# Altium PCB Controlador de velocidad.PcbDoc (part 2 of 2)
Units mil, origin at the board's own origin, x right, y up, seen from the top; angles counter-clockwise.
Board outline 3345 x 2660 mil, 2 copper layers (Top Layer, Bottom Layer); 54 components, 93 nets, 258 pads, 44 vias.
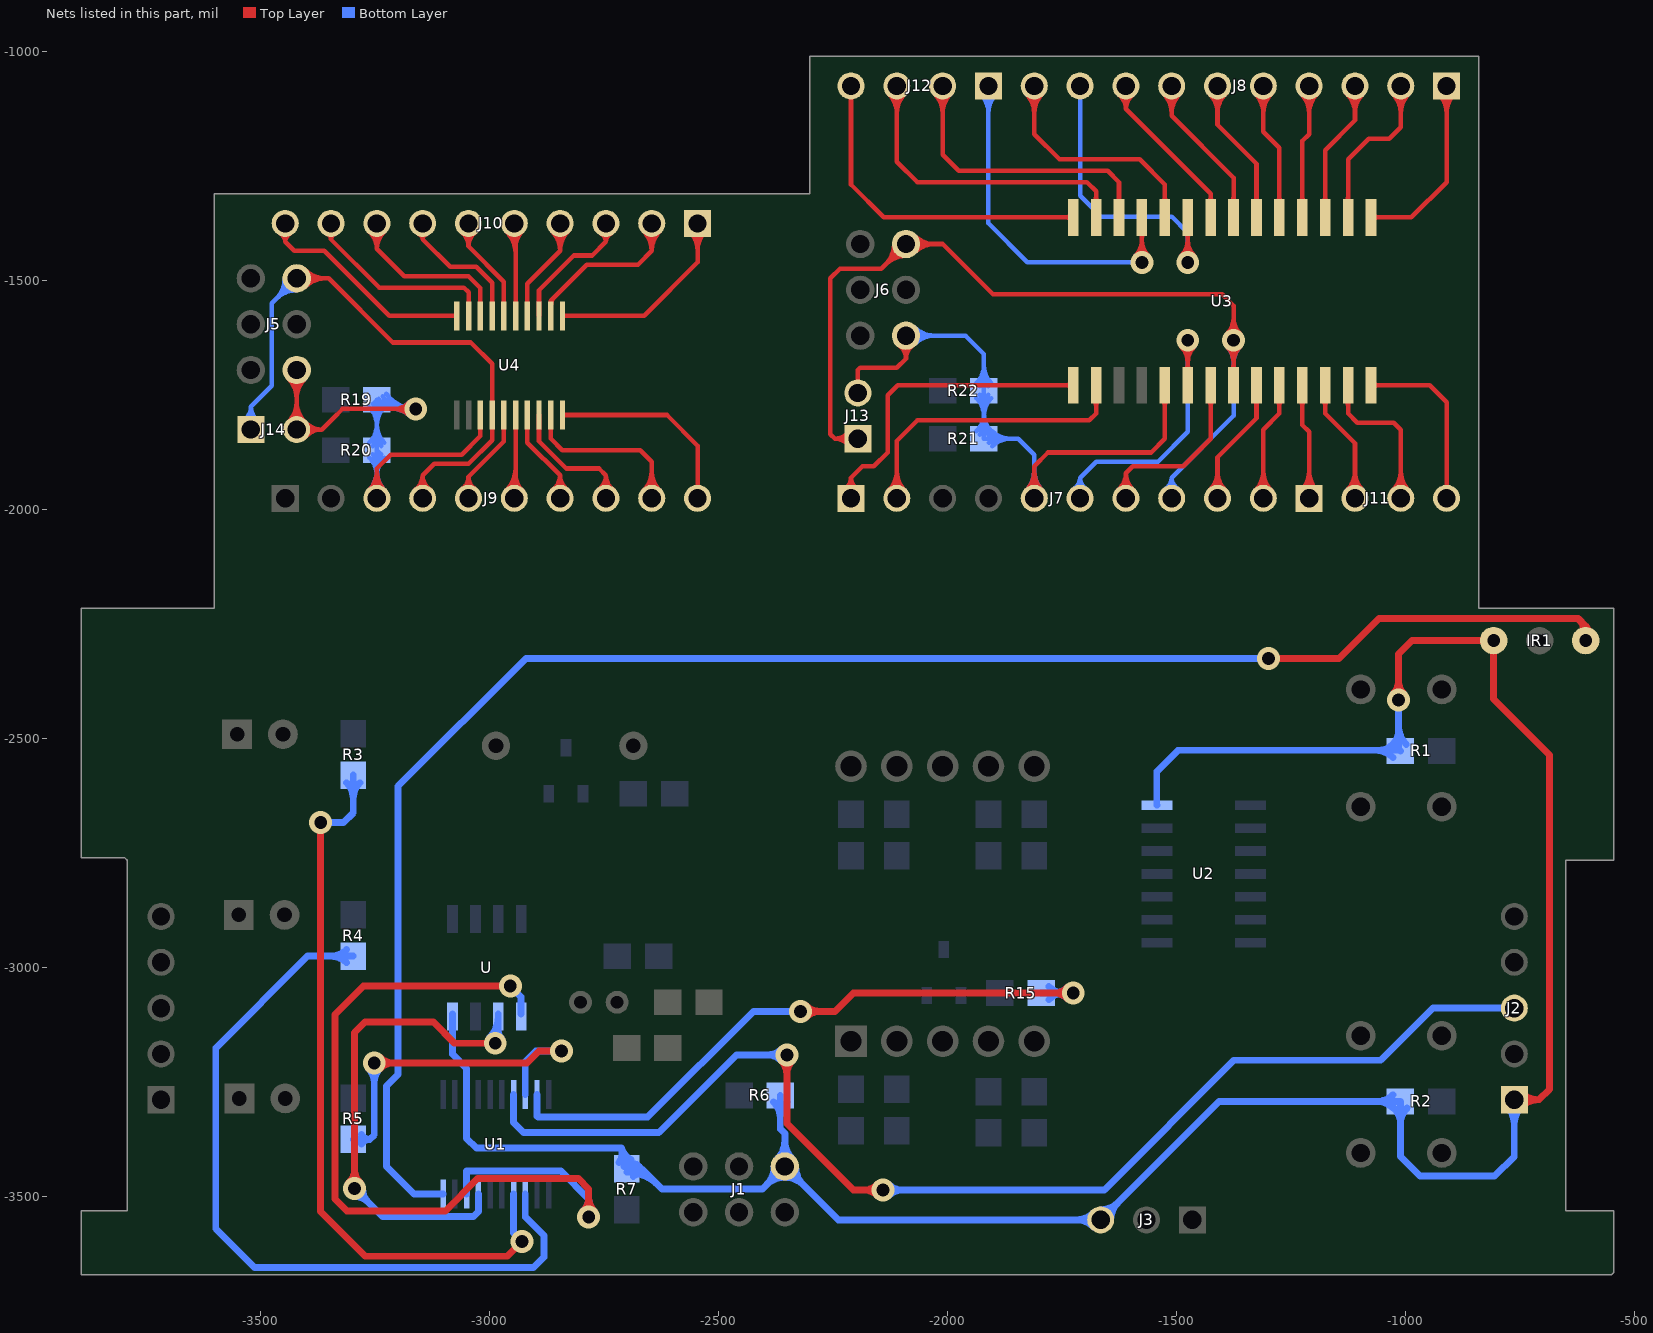
[diagram p2: the nets of this part, all layers, seen from the top]

## Via types
v1: diameter 50, hole 28, Top Layer to Bottom Layer, 44 vias

## Nets (pads, with @x,y where several pads share a name; then routed paths per layer and width w, separated by ;. In a path a pad name is that pad's centre, name@x,y a point inside that pad or via, vN(x,y) a via of type N, cw(c..) or ccw(c..) an arc to the next point about the centre after c; other vN are vias at no path point) (continued)
OPTO: J2.3 U1.7 | length 2964.6
  Top Layer w15: v1@-2362.37,-3202.37 cw(c-2392.25,-3232.25) -2350,-3232.25 cw(c-2307.75,-3232.25) v1@-2337.63,-3202.37 ; v1(-2350,-3190) -2350,-3340 -2205,-3485 v1(-2140,-3485) ; v1@-2152.37,-3497.37 ccw(c-2182.25,-3527.25) -2182.25,-3485 ccw(c-2182.25,-3442.75) v1@-2152.37,-3472.63
  Bottom Layer w15: U1.7@-2946.61,-3276.73 -2946.61,-3337.54 -2924.63,-3359.52 -2629.63,-3359.52 -2460.11,-3190 v1(-2350,-3190) ; v1@-2362.37,-3202.37 ccw(c-2392.25,-3232.25) -2392.25,-3190 ccw(c-2392.25,-3147.75) v1@-2362.37,-3177.63 ; v1(-2140,-3485) -1657.11,-3485 -1373.63,-3201.52 -1053.63,-3201.52 -939.93,-3087.82 J2.3@-762.17,-3087.82 ; v1@-2127.63,-3497.37 cw(c-2097.75,-3527.25) -2097.75,-3485 cw(c-2097.75,-3442.75) v1@-2127.63,-3472.63
RX: IR1.1 U1.20 | length 3857.9
  Top Layer w15: v1(-1298.63,-2324.52) -1144.52,-2324.52 -1057.52,-2237.52 -622.48,-2237.52 ; IR1.1@-613.39,-2282.68 ccw(c-651.93,-2266.94) -622.5,-2237.5 ; -606.54,-2253.46 cw(c-629.27,-2276.19) IR1.1@-599.51,-2288.35 ; IR1.1@-606.45,-2285.51 -606.45,-2253.55 -622.48,-2237.52
  Bottom Layer w15: U1.20@-3100.16,-3493.27 -3100.16,-3493.52 -3163.63,-3493.52 -3223.63,-3433.52 -3223.63,-3257.52 -3198.63,-3232.52 -3198.63,-2603.52 -2919.63,-2324.52 v1(-1298.63,-2324.52)
SCL: U1.17 U.6 | length 1279.3
  Top Layer w15: v1@-3306.01,-3469.15 ccw(c-3335.88,-3439.27) -3293.63,-3439.27 ccw(c-3251.39,-3439.27) v1@-3281.26,-3469.15 ; v1(-3293.63,-3481.52) -3293.63,-3141.52 -3270.63,-3118.52 -3121.48,-3118.52 -3075.48,-3164.52 v1(-2986.63,-3164.52)
  Bottom Layer w15: v1@-3293.63,-3499.02 cw(c-3293.63,-3541.27) -3263.76,-3511.4 cw(c-3233.89,-3481.52) v1@-3276.13,-3481.52 ; v1(-3293.63,-3481.52) -3232.63,-3542.52 -3034.39,-3542.52 -3023.39,-3531.52 U1.17@-3023.39,-3493.27 ; v1@-2999.01,-3152.15 ccw(c-3044.9,-3106.26) U.6@-2980,-3106.26 ; v1(-2986.63,-3164.52) -2980,-3157.89 U.6@-2980,-3101 ; -2980,-3138.29 ccw(c-2960.4,-3138.29) v1@-2974.26,-3152.15
SDA: U1.18 U.5 | length 2053.9
  Top Layer w15: v1(-2953.63,-3039.52) -3274.63,-3039.52 -3336.63,-3101.52 -3336.63,-3504.52 -3310.63,-3530.52 -3095.52,-3530.52 -3025,-3460 -2805,-3460 -2782.63,-3482.37 v1(-2782.63,-3543.52) ; v1@-2795.01,-3531.15 ccw(c-2824.88,-3501.27) -2782.63,-3501.27 ccw(c-2740.39,-3501.27) v1@-2770.26,-3531.15
  Bottom Layer w15: U1.18@-3048.98,-3493.27 -3048.98,-3443.52 -2843.19,-3443.52 -2782.63,-3504.08 ; v1(-2953.63,-3039.52) -2930,-3063.16 U.5@-2930,-3101 ; v1@-2794.38,-3530.55 ccw(c-2818.33,-3504.08) -2782.63,-3504.08 ; v1(-2782.63,-3543.52) -2782.63,-3504.08 ; v1@-2770.89,-3530.55 cw(c-2746.94,-3504.08) -2782.63,-3504.08
SH4-3: J5.6 J9.3 J14.2 R19.1 R20.1 U4.3 | length 2601.1
  Top Layer w10: J5.6@-3438.39,-1713.38 cw(c-3482.77,-1757.77) -3420,-1757.77 cw(c-3357.23,-1757.77) J5.6@-3401.62,-1713.38 ; J14.2@-3437.34,-1807.66 ccw(c-3479.21,-1765.79) -3420,-1765.79 ccw(c-3360.79,-1765.79) J14.2@-3402.66,-1807.66 ; J5.6@-3431.31,-1706.31 cw(c-3458.63,-1733.63) -3420,-1733.63 cw(c-3381.38,-1733.62) J5.6@-3408.69,-1706.31 ; J14.2@-3430.27,-1814.73 ccw(c-3455.07,-1789.93) -3420,-1789.93 ccw(c-3384.93,-1789.93) J14.2@-3409.73,-1814.73 ; J5.6@-3420,-1695 J14.2@-3420,-1825 -3365,-1825 ; J14.2@-3409.19,-1834.71 cw(c-3387.43,-1854.25) -3387.43,-1825 cw(c-3387.43,-1795.75) J14.2@-3409.19,-1815.29 ; J14.2@-3401.75,-1841.39 cw(c-3365,-1874.39) -3365,-1825 ; J14.2@-3401.75,-1808.61 ccw(c-3365,-1775.61) -3365,-1825 ; J9.3@-3262.34,-1957.66 ccw(c-3304.22,-1915.78) -3245,-1915.78 ccw(c-3185.79,-1915.78) J9.3@-3227.66,-1957.66 ; J9.3@-3255.27,-1964.73 ccw(c-3280.07,-1939.93) -3245,-1939.93 ccw(c-3209.93,-1939.93) J9.3@-3234.73,-1964.73 ; J9.3@-3245,-1975 -3245,-1910 -3215,-1880 -3060,-1880 -3018.98,-1838.98 U4.3@-3018.98,-1793.27 ; v1@-3174.14,-1794.14 ccw(c-3208.29,-1828.28) -3208.29,-1780 ccw(c-3208.29,-1731.71) v1@-3174.14,-1765.86 ; v1(-3160,-1780) -3320,-1780 -3340,-1800 -3365,-1825
  Bottom Layer w10: J9.3@-3262.34,-1957.66 ccw(c-3304.22,-1915.78) -3245,-1915.78 ccw(c-3185.79,-1915.78) J9.3@-3227.66,-1957.66 ; R20.1@-3261.26,-1886.26 cw(c-3300.53,-1925.53) -3245,-1925.53 cw(c-3189.47,-1925.53) R20.1@-3228.74,-1886.26 ; R20.1@-3261.26,-1853.74 ccw(c-3300.53,-1814.47) -3245,-1814.47 ccw(c-3189.47,-1814.47) R20.1@-3228.74,-1853.74 ; R19.1@-3261.26,-1776.26 cw(c-3300.53,-1815.53) -3245,-1815.53 cw(c-3189.47,-1815.53) R19.1@-3228.74,-1776.26 ; J9.3@-3255.27,-1964.73 ccw(c-3280.07,-1939.93) -3245,-1939.93 ccw(c-3209.93,-1939.93) J9.3@-3234.73,-1964.73 ; R20.1@-3254.19,-1879.19 cw(c-3276.39,-1901.38) -3245,-1901.38 cw(c-3213.62,-1901.38) R20.1@-3235.81,-1879.19 ; R20.1@-3254.19,-1860.81 ccw(c-3276.39,-1838.61) -3245,-1838.61 ccw(c-3213.62,-1838.61) R20.1@-3235.81,-1860.81 ; R19.1@-3254.19,-1769.19 cw(c-3276.39,-1791.38) -3245,-1791.38 cw(c-3213.62,-1791.38) R19.1@-3235.81,-1769.19 ; R19.1@-3248.72,-1764.04 ccw(c-3217.91,-1742.28) R19.1@-3217.91,-1780 ; J9.3@-3245,-1975 R20.1@-3245,-1870 ; R19.1@-3245,-1760 R19.1@-3245,-1780 ; R19.1@-3240.55,-1758.27 ccw(c-3198.61,-1728.66) -3198.61,-1780 ; R20.1@-3240,-1875 R20.1@-3245,-1870 ; R19.1@-3232.38,-1752.5 ccw(c-3179.31,-1715.03) v1@-3179.31,-1780 ; R19.1@-3224.21,-1746.73 ccw(c-3160,-1701.4) v1(-3160,-1780) R19.1@-3245,-1780 ; v1@-3174.14,-1794.14 ccw(c-3208.29,-1828.28) -3208.29,-1780 ccw(c-3208.29,-1731.71) v1@-3174.14,-1765.86 ; R20.1@-3245,-1870 R19.1@-3245,-1780
SH4-4: J5.2 J9.4 J14.1 U4.4 | length 1823.8
  Top Layer w10: J5.2@-3420,-1495 -3350,-1495 -3210,-1635 -3040,-1635 -2993.39,-1681.61 U4.4@-2993.39,-1793.27 -2993.39,-1848.39 -3045,-1900 -3120,-1900 -3145,-1925 ; J5.2@-3408.69,-1506.31 cw(c-3381.37,-1533.63) -3381.37,-1495 cw(c-3381.37,-1456.37) J5.2@-3408.69,-1483.69 ; J5.2@-3401.62,-1513.38 cw(c-3357.23,-1557.77) -3357.23,-1495 cw(c-3357.23,-1432.23) J5.2@-3401.62,-1476.61 ; J9.4@-3160.01,-1955.6 ccw(c-3183.69,-1925) -3145,-1925 ; J9.4@-3153.89,-1963.51 ccw(c-3167.92,-1945.39) -3145,-1945.39 ccw(c-3122.08,-1945.39) J9.4@-3136.11,-1963.51 ; J9.4@-3145,-1980 J9.4@-3145,-1975 -3145,-1925 ; J9.4@-3129.99,-1955.6 cw(c-3106.31,-1925) -3145,-1925
  Bottom Layer w10: J14.1@-3535.01,-1805.6 ccw(c-3558.69,-1775) -3520,-1775 ; J14.1@-3528.89,-1813.51 ccw(c-3542.92,-1795.39) -3520,-1795.39 ccw(c-3497.08,-1795.39) J14.1@-3511.11,-1813.51 ; J14.1@-3520,-1825 -3520,-1775 ; J14.1@-3504.99,-1805.6 cw(c-3481.31,-1775) -3520,-1775 ; J5.2@-3446,-1495 cw(c-3508.77,-1495) -3464.39,-1539.38 cw(c-3420,-1583.77) J5.2@-3420,-1521 ; J5.2@-3436,-1495 cw(c-3474.63,-1495) -3447.31,-1522.31 cw(c-3420,-1549.63) J5.2@-3420,-1511 ; J5.2@-3420,-1495 -3474,-1549 -3474,-1729 -3520,-1775
SH4-5: J9.5 U4.5 | length 276
  Top Layer w10: J9.5@-3058.93,-1954.81 ccw(c-3077.22,-1928.29) -3045,-1928.29 ; J9.5@-3045,-1975 -3045,-1928.28 ; J9.5@-3031.07,-1954.81 cw(c-3012.78,-1928.29) -3045,-1928.29 ; U4.5@-2967.8,-1793.27 -2967.8,-1851.08 -3045,-1928.28
SH4-6: J9.6 U4.6 | length 312.6
  Top Layer w10: J9.6@-2962.34,-1957.66 ccw(c-3010.97,-1909.03) -2942.2,-1909.03 ; J9.6@-2955.27,-1964.73 ccw(c-2986.82,-1933.18) -2942.2,-1933.18 ; J9.6@-2945,-1975 -2942.2,-1975 U4.6@-2942.2,-1793.27 ; -2942.2,-1922.53 ccw(c-2892.54,-1922.53) J9.6@-2927.66,-1957.66
SH4-7: J9.7 U4.7 | length 323.8
  Top Layer w10: U4.7@-2916.61,-1793.27 -2916.61,-1853.39 -2845,-1925 ; J9.7@-2860.01,-1955.6 ccw(c-2883.69,-1925) -2845,-1925 ; J9.7@-2853.89,-1963.51 ccw(c-2867.92,-1945.39) -2845,-1945.39 ccw(c-2822.08,-1945.39) J9.7@-2836.11,-1963.51 ; J9.7@-2845,-1975 -2845,-1925 ; J9.7@-2829.99,-1955.6 cw(c-2806.31,-1925) -2845,-1925
SH4-8: J9.8 U4.8 | length 396.6
  Top Layer w10: U4.8@-2891.02,-1793.27 -2891.02,-1850.69 -2831.71,-1910 -2760,-1910 -2745,-1925 ; J9.8@-2760.01,-1955.6 ccw(c-2783.69,-1925) -2745,-1925 ; J9.8@-2753.89,-1963.51 ccw(c-2767.92,-1945.39) -2745,-1945.39 ccw(c-2722.08,-1945.39) J9.8@-2736.11,-1963.51 ; J9.8@-2745,-1975 -2745,-1925 ; J9.8@-2729.99,-1955.6 cw(c-2706.31,-1925) -2745,-1925
SH4-9: J9.9 U4.9 | length 520.7
  Top Layer w10: U4.9@-2865.43,-1793.27 -2865.43,-1844.57 -2840,-1870 -2670,-1870 -2645,-1895 J9.9@-2645,-1975 ; J9.9@-2662.34,-1957.66 ccw(c-2704.22,-1915.78) -2645,-1915.78 ccw(c-2585.79,-1915.78) J9.9@-2627.66,-1957.66 ; J9.9@-2655.27,-1964.73 ccw(c-2680.07,-1939.93) -2645,-1939.93 ccw(c-2609.93,-1939.93) J9.9@-2634.73,-1964.73
SH4-10: J9.10 U4.10 | length 437.5
  Top Layer w10: U4.10@-2839.84,-1793.27 -2611.73,-1793.27 -2545,-1860 J9.10@-2545,-1975
SH4-11: J10.1 U4.11 | length 576.3
  Top Layer w10: U4.11@-2839.84,-1576.73 -2661.73,-1576.73 -2545,-1460 J10.1@-2545,-1375 ; J10.1@-2562.34,-1392.34 cw(c-2604.22,-1434.21) -2545,-1434.21 cw(c-2485.79,-1434.21) J10.1@-2527.66,-1392.34 ; J10.1@-2555.27,-1385.27 cw(c-2580.07,-1410.07) -2545,-1410.07 cw(c-2509.93,-1410.07) J10.1@-2534.73,-1385.27
SH4-12: J10.2 U4.12 | length 522.4
  Top Layer w10: U4.12@-2865.43,-1576.73 -2865.43,-1543.71 -2786.72,-1465 -2675,-1465 -2645,-1435 J10.2@-2645,-1375 ; U4.12@-2864.53,-1551.14 cw(c-2844.4,-1551.14) -2858.63,-1536.91 ; J10.2@-2662.34,-1392.34 cw(c-2704.22,-1434.21) -2645,-1434.21 cw(c-2585.79,-1434.21) J10.2@-2627.66,-1392.34 ; J10.2@-2655.27,-1385.27 cw(c-2680.07,-1410.07) -2645,-1410.07 cw(c-2609.93,-1410.07) J10.2@-2634.73,-1385.27
SH4-13: J10.3 U4.13 | length 330.4
  Top Layer w10: U4.13@-2891.02,-1576.73 -2891.02,-1521.02 -2815,-1445 -2775,-1445 -2745,-1415 J10.3@-2745,-1375 ; J10.3@-2756.12,-1396.86 cw(c-2765.35,-1415) -2745,-1415 cw(c-2724.65,-1415) J10.3@-2733.88,-1396.86
SH4-14: J10.4 U4.14 | length 379.5
  Top Layer w10: U4.14@-2916.61,-1576.73 -2916.61,-1506.61 -2845,-1435 J10.4@-2845,-1375 ; J10.4@-2862.34,-1392.34 cw(c-2904.22,-1434.21) -2845,-1434.21 cw(c-2785.79,-1434.21) J10.4@-2827.66,-1392.34 ; J10.4@-2855.27,-1385.27 cw(c-2880.07,-1410.07) -2845,-1410.07 cw(c-2809.93,-1410.07) J10.4@-2834.73,-1385.27
SH4-15: J10.5 U4.15 | length 332.6
  Top Layer w10: J10.5@-2962.34,-1392.34 cw(c-3010.97,-1440.96) -2942.2,-1440.96 ; J10.5@-2955.27,-1385.27 cw(c-2986.82,-1416.82) -2942.2,-1416.82 ; J10.5@-2945,-1375 -2942.2,-1375 U4.15@-2942.2,-1576.73 ; -2942.2,-1427.46 cw(c-2892.54,-1427.46) J10.5@-2927.66,-1392.34
SH4-16: J10.6 U4.16 | length 346.1
  Top Layer w10: J10.6@-3060.01,-1394.4 cw(c-3083.69,-1425) -3045,-1425 cw(c-3006.31,-1425) J10.6@-3029.99,-1394.4 ; J10.6@-3053.89,-1386.49 cw(c-3067.92,-1404.61) -3045,-1404.61 cw(c-3022.08,-1404.61) J10.6@-3036.11,-1386.49 ; J10.6@-3045,-1375 -3045,-1425 -2967.8,-1502.2 U4.16@-2967.8,-1576.73
SH4-17: J10.7 U4.17 | length 328.8
  Top Layer w10: J10.7@-3153.37,-1398.05 cw(c-3157.71,-1410) -3145,-1410 ; J10.7@-3145,-1375 -3145,-1410 ; J10.7@-3136.63,-1398.05 ccw(c-3132.29,-1410) -3145,-1410 ; U4.17@-2993.39,-1576.73 -2993.39,-1504.9 -3028.28,-1470 -3085,-1470 -3145,-1410
SH4-18: J10.8 U4.18 | length 509.3
  Top Layer w10: J10.8@-3261.39,-1393.25 cw(c-3294.39,-1430) -3245,-1430 cw(c-3195.61,-1430) J10.8@-3228.61,-1393.25 ; J10.8@-3254.71,-1385.81 cw(c-3274.26,-1407.57) -3245,-1407.57 cw(c-3215.74,-1407.57) J10.8@-3235.29,-1385.81 ; J10.8@-3245,-1375 -3245,-1430 -3185,-1490 -3045,-1490 -3018.98,-1516.02 U4.18@-3018.98,-1576.73
SH4-19: J10.9 U4.19 | length 465.6
  Top Layer w10: J10.9@-3353.37,-1398.05 cw(c-3357.71,-1410) -3345,-1410 ; J10.9@-3345,-1375 -3345,-1410 ; J10.9@-3336.63,-1398.05 ccw(c-3332.29,-1410) -3345,-1410 ; U4.19@-3044.57,-1576.73 -3044.57,-1525.43 -3055,-1515 -3240,-1515 -3345,-1410
SH4-20: J10.10 U4.20 | length 526.6
  Top Layer w10: J10.10@-3456.12,-1396.86 cw(c-3465.35,-1415) -3445,-1415 cw(c-3424.65,-1415) J10.10@-3433.88,-1396.86 ; J10.10@-3445,-1375 -3445,-1415 -3425,-1435 -3360,-1435 -3218.27,-1576.73 U4.20@-3070.16,-1576.73
SH16-1: J7.1 U3.1 | length 769.8
  Top Layer w10: J7.1@-2223.29,-1954.38 ccw(c-2239.01,-1930) -2210,-1930 ; J7.1@-2210,-1975 -2210,-1930 ; J7.1@-2196.71,-1954.38 cw(c-2180.99,-1930) -2210,-1930 ; U3.1@-1729.68,-1732.94 ccw(c-1740.97,-1744.24) -1740.97,-1728.27 ccw(c-1740.97,-1712.3) U3.1@-1729.68,-1723.59 ; U3.1@-1725,-1728.27 -2108.27,-1728.27 -2130,-1750 -2130,-1875 -2160,-1905 -2185,-1905 -2210,-1930
SH16-2: J7.2 U3.2 | length 819.8
  Top Layer w10: J7.2@-2127.34,-1957.66 ccw(c-2169.22,-1915.78) -2110,-1915.78 ccw(c-2050.79,-1915.78) J7.2@-2092.66,-1957.66 ; J7.2@-2120.27,-1964.73 ccw(c-2145.07,-1939.93) -2110,-1939.93 ccw(c-2074.93,-1939.93) J7.2@-2099.73,-1964.73 ; J7.2@-2110,-1975 -2110,-1850 -2065,-1805 -1690,-1805 -1675,-1790 U3.2@-1675,-1728.27 ; U3.2@-1679.68,-1761.68 cw(c-1690.97,-1772.98) -1675,-1772.98 cw(c-1659.03,-1772.98) U3.2@-1670.32,-1761.68
SH16-5: J6.6 J7.5 J13.2 R21.1 R22.1 U3.5 | length 2396.9
  Top Layer w10: J13.2@-2195,-1745 -2195,-1695 -2190,-1690 -2110,-1690 -2090,-1670 J6.6@-2090,-1620 ; J6.6@-2104.93,-1641.28 cw(c-2125.08,-1670) -2090,-1670 cw(c-2054.93,-1670) J6.6@-2075.07,-1641.28 ; J7.5@-1827.34,-1957.66 ccw(c-1869.22,-1915.78) -1810,-1915.78 ccw(c-1750.79,-1915.78) J7.5@-1792.66,-1957.66 ; J7.5@-1820.27,-1964.73 ccw(c-1845.07,-1939.93) -1810,-1939.93 ccw(c-1774.93,-1939.93) J7.5@-1799.73,-1964.73 ; J7.5@-1810,-1975 -1810,-1905 -1780,-1875 -1555,-1875 -1525,-1845 U3.5@-1525,-1728.27 ; U3.5@-1529.68,-1761.68 cw(c-1540.97,-1772.98) -1525,-1772.98 cw(c-1509.03,-1772.98) U3.5@-1520.32,-1761.68
  Bottom Layer w10: J6.6@-2090,-1620 -1960,-1620 -1920,-1660 R22.1@-1920,-1740 R21.1@-1920,-1845 -1845,-1845 -1810,-1880 J7.5@-1810,-1975 ; J6.6@-2078.69,-1631.31 cw(c-2051.37,-1658.63) -2051.37,-1620 cw(c-2051.37,-1581.37) J6.6@-2078.69,-1608.69 ; J6.6@-2071.62,-1638.38 cw(c-2027.23,-1682.77) -2027.23,-1620 cw(c-2027.23,-1557.23) J6.6@-2071.62,-1601.61 ; R21.1@-1936.26,-1828.74 ccw(c-1975.53,-1789.47) -1920,-1789.47 ccw(c-1864.47,-1789.47) R21.1@-1903.74,-1828.74 ; R22.1@-1936.26,-1756.26 cw(c-1975.53,-1795.53) -1920,-1795.53 cw(c-1864.47,-1795.53) R22.1@-1903.74,-1756.26 ; R22.1@-1936.26,-1723.74 ccw(c-1975.53,-1684.47) -1920,-1684.47 ccw(c-1864.47,-1684.47) R22.1@-1903.74,-1723.74 ; R21.1@-1929.19,-1835.81 ccw(c-1951.39,-1813.61) -1920,-1813.61 ccw(c-1888.62,-1813.61) R21.1@-1910.81,-1835.81 ; R22.1@-1929.19,-1749.19 cw(c-1951.39,-1771.38) -1920,-1771.38 cw(c-1888.62,-1771.38) R22.1@-1910.81,-1749.19 ; R22.1@-1929.19,-1730.81 ccw(c-1951.39,-1708.61) -1920,-1708.61 ccw(c-1888.62,-1708.61) R22.1@-1910.81,-1730.81 ; R21.1@-1908.81,-1854.19 cw(c-1886.62,-1876.38) -1886.62,-1845 cw(c-1886.62,-1813.61) R21.1@-1908.81,-1835.81 ; R21.1@-1901.74,-1861.26 cw(c-1862.47,-1900.53) -1862.47,-1845 cw(c-1862.47,-1789.47) R21.1@-1901.74,-1828.74 ; J7.5@-1827.34,-1957.66 ccw(c-1869.22,-1915.78) -1810,-1915.78 ccw(c-1750.79,-1915.78) J7.5@-1792.66,-1957.66 ; J7.5@-1820.27,-1964.73 ccw(c-1845.07,-1939.93) -1810,-1939.93 ccw(c-1774.93,-1939.93) J7.5@-1799.73,-1964.73
SH16-6: J7.6 U3.6 | length 778.5
  Top Layer w10: v1@-1489.14,-1644.14 cw(c-1523.29,-1678.28) -1475,-1678.28 cw(c-1426.72,-1678.28) v1@-1460.86,-1644.14 ; U3.6@-1479.68,-1694.85 ccw(c-1490.97,-1683.56) -1475,-1683.56 ccw(c-1459.03,-1683.56) U3.6@-1470.32,-1694.85 ; U3.6@-1475,-1728.27 v1(-1475,-1630)
  Bottom Layer w10: J7.6@-1723.29,-1954.39 ccw(c-1739.01,-1930) -1710,-1930 ; J7.6@-1710,-1975 -1710,-1930 ; J7.6@-1696.71,-1954.39 cw(c-1680.99,-1930) -1710,-1930 ; v1(-1475,-1630) -1475,-1830 -1540,-1895 -1675,-1895 -1710,-1930
SH16-7: J7.7 U3.7 | length 544.9
  Top Layer w10: J7.7@-1626.39,-1956.75 ccw(c-1659.39,-1920) -1610,-1920 ; J7.7@-1619.71,-1964.19 ccw(c-1639.26,-1942.43) -1610,-1942.43 ccw(c-1580.74,-1942.43) J7.7@-1600.29,-1964.19 ; J7.7@-1610,-1975 -1610,-1920 ; J7.7@-1593.61,-1956.75 cw(c-1560.61,-1920) -1610,-1920 ; U3.7@-1429.68,-1761.68 cw(c-1440.97,-1772.98) -1425,-1772.98 cw(c-1409.03,-1772.98) U3.7@-1420.32,-1761.68 ; U3.7@-1425,-1728.27 -1425,-1845 -1485,-1905 -1595,-1905 -1610,-1920
SH16-8: J6.2 J7.8 J13.1 U3.8 | length 2686.8
  Top Layer w10: J13.1@-2214.4,-1860.01 ccw(c-2245,-1883.69) -2245,-1845 ; J13.1@-2214.4,-1829.99 cw(c-2245,-1806.31) -2245,-1845 ; J13.1@-2206.49,-1853.89 ccw(c-2224.61,-1867.92) -2224.61,-1845 ccw(c-2224.61,-1822.08) J13.1@-2206.49,-1836.11 ; J13.1@-2195,-1845 -2245,-1845 ; J6.2@-2116,-1420 cw(c-2178.77,-1420) -2134.39,-1464.38 cw(c-2090,-1508.77) J6.2@-2090,-1446 ; J6.2@-2106,-1420 cw(c-2144.63,-1420) -2117.31,-1447.31 cw(c-2090,-1474.63) J6.2@-2090,-1436 ; J6.2@-2078.69,-1431.31 cw(c-2051.37,-1458.63) -2051.37,-1420 cw(c-2051.37,-1381.37) J6.2@-2078.69,-1408.69 ; J6.2@-2071.62,-1438.38 cw(c-2027.23,-1482.77) -2027.23,-1420 cw(c-2027.23,-1357.23) J6.2@-2071.62,-1401.61 ; v1@-1389.14,-1644.14 cw(c-1423.29,-1678.28) -1375,-1678.28 cw(c-1326.72,-1678.28) v1@-1360.86,-1644.14 ; v1@-1389.14,-1615.86 ccw(c-1423.29,-1581.71) -1375,-1581.71 ccw(c-1326.72,-1581.71) v1@-1360.86,-1615.86 ; U3.8@-1379.68,-1694.85 ccw(c-1390.97,-1683.56) -1375,-1683.56 ccw(c-1359.03,-1683.56) U3.8@-1370.32,-1694.85 ; U3.8@-1375,-1728.27 v1(-1375,-1630) -1375,-1555 -1400,-1530 -1900,-1530 -2010,-1420 J6.2@-2090,-1420 -2144,-1474 -2234,-1474 -2255,-1495 -2255,-1835 -2245,-1845
  Bottom Layer w10: J7.8@-1523.29,-1954.39 ccw(c-1539.01,-1930) -1510,-1930 ; J7.8@-1510,-1975 -1510,-1930 ; J7.8@-1496.71,-1954.39 cw(c-1480.99,-1930) -1510,-1930 ; v1@-1389.14,-1644.14 cw(c-1423.29,-1678.28) -1375,-1678.28 cw(c-1326.72,-1678.28) v1@-1360.86,-1644.14 ; v1(-1375,-1630) -1375,-1795 -1510,-1930
SH16-9: J7.9 U3.9 | length 455.1
  Top Layer w10: J7.9@-1427.34,-1957.66 ccw(c-1469.22,-1915.78) -1410,-1915.78 ccw(c-1350.79,-1915.78) J7.9@-1392.66,-1957.66 ; J7.9@-1420.27,-1964.73 ccw(c-1445.07,-1939.93) -1410,-1939.93 ccw(c-1374.93,-1939.93) J7.9@-1399.73,-1964.73 ; J7.9@-1410,-1975 -1410,-1885 -1325,-1800 U3.9@-1325,-1728.27 ; U3.9@-1329.68,-1761.68 cw(c-1340.97,-1772.98) -1325,-1772.98 cw(c-1309.03,-1772.98) U3.9@-1320.32,-1761.68
SH16-10: J7.10 U3.10 | length 434.4
  Top Layer w10: J7.10@-1327.34,-1957.66 ccw(c-1369.22,-1915.78) -1310,-1915.78 ccw(c-1250.79,-1915.78) J7.10@-1292.66,-1957.66 ; J7.10@-1320.27,-1964.73 ccw(c-1345.07,-1939.93) -1310,-1939.93 ccw(c-1274.93,-1939.93) J7.10@-1299.73,-1964.73 ; J7.10@-1310,-1975 -1310,-1825 -1275,-1790 U3.10@-1275,-1728.27 ; U3.10@-1279.68,-1761.68 cw(c-1290.97,-1772.98) -1275,-1772.98 cw(c-1259.03,-1772.98) U3.10@-1270.32,-1761.68
SH16-11: J11.1 U3.11 | length 426.1
  Top Layer w10: U3.11@-1229.68,-1761.68 cw(c-1240.97,-1772.98) -1225,-1772.98 cw(c-1209.03,-1772.98) U3.11@-1220.32,-1761.68 ; J11.1@-1227.34,-1957.66 ccw(c-1269.22,-1915.78) -1210,-1915.78 ccw(c-1150.79,-1915.78) J11.1@-1192.66,-1957.66 ; U3.11@-1225,-1728.27 -1225,-1815 -1210,-1830 J11.1@-1210,-1975 ; J11.1@-1220.27,-1964.73 ccw(c-1245.07,-1939.93) -1210,-1939.93 ccw(c-1174.93,-1939.93) J11.1@-1199.73,-1964.73
SH16-12: J11.2 U3.12 | length 446.8
  Top Layer w10: U3.12@-1179.68,-1761.68 cw(c-1190.97,-1772.98) -1175,-1772.98 cw(c-1159.03,-1772.98) U3.12@-1170.32,-1761.68 ; U3.12@-1175,-1728.27 -1175,-1790 -1110,-1855 J11.2@-1110,-1975 ; J11.2@-1127.34,-1957.66 ccw(c-1169.22,-1915.78) -1110,-1915.78 ccw(c-1050.79,-1915.78) J11.2@-1092.66,-1957.66 ; J11.2@-1120.27,-1964.73 ccw(c-1145.07,-1939.93) -1110,-1939.93 ccw(c-1074.93,-1939.93) J11.2@-1099.73,-1964.73
SH16-13: J11.3 U3.13 | length 514.4
  Top Layer w10: U3.13@-1129.68,-1761.68 cw(c-1140.97,-1772.98) -1125,-1772.98 cw(c-1109.03,-1772.98) U3.13@-1120.32,-1761.68 ; U3.13@-1125,-1728.27 -1125,-1790 -1105,-1810 -1025,-1810 -1010,-1825 J11.3@-1010,-1975 ; J11.3@-1027.34,-1957.66 ccw(c-1069.22,-1915.78) -1010,-1915.78 ccw(c-950.79,-1915.78) J11.3@-992.66,-1957.66 ; J11.3@-1020.27,-1964.73 ccw(c-1045.07,-1939.93) -1010,-1939.93 ccw(c-974.93,-1939.93) J11.3@-999.73,-1964.73
SH16-14: J11.4 U3.14 | length 415.3
  Top Layer w10: U3.14@-1075,-1728.27 -946.73,-1728.27 -910,-1765 J11.4@-910,-1975 ; U3.14@-1070.32,-1732.94 cw(c-1059.03,-1744.24) -1059.03,-1728.27 cw(c-1059.03,-1712.3) U3.14@-1070.32,-1723.59
SH16-15: J8.1 U3.15 | length 580
  Top Layer w10: U3.15@-1075,-1361.73 -986.73,-1361.73 -910,-1285 J8.1@-910,-1075 ; U3.15@-1070.32,-1366.41 cw(c-1059.03,-1377.7) -1059.03,-1361.73 cw(c-1059.03,-1345.76) U3.15@-1070.32,-1357.05 ; J8.1@-927.34,-1092.34 cw(c-969.22,-1134.21) -910,-1134.21 cw(c-850.79,-1134.21) J8.1@-892.66,-1092.34 ; J8.1@-920.27,-1085.27 cw(c-945.07,-1110.07) -910,-1110.07 cw(c-874.93,-1110.07) J8.1@-899.73,-1085.27
SH16-16: J8.2 U3.16 | length 533.9
  Top Layer w10: U3.16@-1129.68,-1328.31 ccw(c-1140.97,-1317.02) -1125,-1317.02 ccw(c-1109.03,-1317.02) U3.16@-1120.32,-1328.31 ; U3.16@-1125,-1361.73 -1125,-1235 -1080,-1190 -1035,-1190 -1010,-1165 J8.2@-1010,-1075 ; J8.2@-1027.34,-1092.34 cw(c-1069.22,-1134.21) -1010,-1134.21 cw(c-950.79,-1134.21) J8.2@-992.66,-1092.34 ; J8.2@-1020.27,-1085.27 cw(c-1045.07,-1110.07) -1010,-1110.07 cw(c-974.93,-1110.07) J8.2@-999.73,-1085.27
SH16-17: J8.3 U3.17 | length 486.8
  Top Layer w10: U3.17@-1179.68,-1328.31 ccw(c-1190.97,-1317.02) -1175,-1317.02 ccw(c-1159.03,-1317.02) U3.17@-1170.32,-1328.31 ; U3.17@-1175,-1361.73 -1175,-1215 -1110,-1150 J8.3@-1110,-1075 ; J8.3@-1127.34,-1092.34 cw(c-1169.22,-1134.21) -1110,-1134.21 cw(c-1050.79,-1134.21) J8.3@-1092.66,-1092.34 ; J8.3@-1120.27,-1085.27 cw(c-1145.07,-1110.07) -1110,-1110.07 cw(c-1074.93,-1110.07) J8.3@-1099.73,-1085.27
SH16-18: J8.4 U3.18 | length 466.1
  Top Layer w10: U3.18@-1229.68,-1328.31 ccw(c-1240.97,-1317.02) -1225,-1317.02 ccw(c-1209.03,-1317.02) U3.18@-1220.32,-1328.31 ; J8.4@-1227.34,-1092.34 cw(c-1269.22,-1134.21) -1210,-1134.21 cw(c-1150.79,-1134.21) J8.4@-1192.66,-1092.34 ; U3.18@-1225,-1361.73 -1225,-1195 -1210,-1180 J8.4@-1210,-1075 ; J8.4@-1220.27,-1085.27 cw(c-1245.07,-1110.07) -1210,-1110.07 cw(c-1174.93,-1110.07) J8.4@-1199.73,-1085.27
SH16-19: J8.5 U3.19 | length 474.4
  Top Layer w10: J8.5@-1327.34,-1092.34 cw(c-1369.22,-1134.21) -1310,-1134.21 cw(c-1250.79,-1134.21) J8.5@-1292.66,-1092.34 ; J8.5@-1320.27,-1085.27 cw(c-1345.07,-1110.07) -1310,-1110.07 cw(c-1274.93,-1110.07) J8.5@-1299.73,-1085.27 ; J8.5@-1310,-1075 -1310,-1175 -1275,-1210 U3.19@-1275,-1361.73 ; U3.19@-1279.68,-1328.31 ccw(c-1290.97,-1317.02) -1275,-1317.02 ccw(c-1259.03,-1317.02) U3.19@-1270.32,-1328.31
SH16-20: J8.6 U3.20 | length 495.1
  Top Layer w10: J8.6@-1427.34,-1092.34 cw(c-1469.22,-1134.21) -1410,-1134.21 cw(c-1350.79,-1134.21) J8.6@-1392.66,-1092.34 ; J8.6@-1420.27,-1085.27 cw(c-1445.07,-1110.07) -1410,-1110.07 cw(c-1374.93,-1110.07) J8.6@-1399.73,-1085.27 ; J8.6@-1410,-1075 -1410,-1160 -1325,-1245 U3.20@-1325,-1361.73 ; U3.20@-1329.68,-1328.31 ccw(c-1340.97,-1317.02) -1325,-1317.02 ccw(c-1309.03,-1317.02) U3.20@-1320.32,-1328.31
SH16-21: J8.7 U3.21 | length 515.8
  Top Layer w10: J8.7@-1527.34,-1092.34 cw(c-1569.22,-1134.21) -1510,-1134.21 cw(c-1450.79,-1134.21) J8.7@-1492.66,-1092.34 ; J8.7@-1520.27,-1085.27 cw(c-1545.07,-1110.07) -1510,-1110.07 cw(c-1474.93,-1110.07) J8.7@-1499.73,-1085.27 ; J8.7@-1510,-1075 -1510,-1140 -1375,-1275 U3.21@-1375,-1361.73 ; U3.21@-1379.68,-1328.31 ccw(c-1390.97,-1317.02) -1375,-1317.02 ccw(c-1359.03,-1317.02) U3.21@-1370.32,-1328.31
SH16-22: J8.8 U3.22 | length 500.8
  Top Layer w10: J8.8@-1625.01,-1094.4 cw(c-1648.69,-1125) -1610,-1125 cw(c-1571.31,-1125) J8.8@-1594.99,-1094.4 ; J8.8@-1618.89,-1086.49 cw(c-1632.92,-1104.61) -1610,-1104.61 cw(c-1587.08,-1104.61) J8.8@-1601.11,-1086.49 ; J8.8@-1610,-1075 -1610,-1125 -1425,-1310 U3.22@-1425,-1361.73 ; U3.22@-1429.68,-1328.31 ccw(c-1440.97,-1317.02) -1425,-1317.02 ccw(c-1409.03,-1317.02) U3.22@-1420.32,-1328.31
SH16-23: J8.9 U3.23 | length 772.3
  Top Layer w10: v1@-1489.14,-1445.86 ccw(c-1523.29,-1411.71) -1475,-1411.71 ccw(c-1426.72,-1411.71) v1@-1460.86,-1445.86 ; U3.23@-1479.68,-1395.15 cw(c-1490.97,-1406.44) -1475,-1406.44 cw(c-1459.03,-1406.44) U3.23@-1470.32,-1395.15 ; v1(-1475,-1460) U3.23@-1475,-1361.73
  Bottom Layer w10: J8.9@-1710,-1075 -1710,-1315 -1665,-1360 -1510,-1360 -1475,-1395 v1(-1475,-1460)
SH16-24: J8.10 U3.24 | length 680.5
  Top Layer w10: J8.10@-1827.34,-1092.34 cw(c-1869.22,-1134.21) -1810,-1134.21 cw(c-1750.79,-1134.21) J8.10@-1792.66,-1092.34 ; J8.10@-1820.27,-1085.27 cw(c-1845.07,-1110.07) -1810,-1110.07 cw(c-1774.93,-1110.07) J8.10@-1799.73,-1085.27 ; J8.10@-1810,-1075 -1810,-1180 -1755,-1235 -1580,-1235 -1525,-1290 U3.24@-1525,-1361.73 ; U3.24@-1529.68,-1328.31 ccw(c-1540.97,-1317.02) -1525,-1317.02 ccw(c-1509.03,-1317.02) U3.24@-1520.32,-1328.31
SH16-25: J12.1 U3.25 | length 1017.5
  Top Layer w10: v1@-1589.14,-1445.86 ccw(c-1623.29,-1411.71) -1575,-1411.71 ccw(c-1526.72,-1411.71) v1@-1560.86,-1445.86 ; U3.25@-1579.68,-1395.15 cw(c-1590.97,-1406.44) -1575,-1406.44 cw(c-1559.03,-1406.44) U3.25@-1570.32,-1395.15 ; v1(-1575,-1460) U3.25@-1575,-1361.73
  Bottom Layer w10: J12.1@-1927.34,-1092.34 cw(c-1969.22,-1134.21) -1910,-1134.21 cw(c-1850.79,-1134.21) J12.1@-1892.66,-1092.34 ; J12.1@-1920.27,-1085.27 cw(c-1945.07,-1110.07) -1910,-1110.07 cw(c-1874.93,-1110.07) J12.1@-1899.73,-1085.27 ; J12.1@-1910,-1075 -1910,-1375 -1825,-1460 v1(-1575,-1460)
SH16-26: J12.2 U3.26 | length 809.8
  Top Layer w10: J12.2@-2027.34,-1092.34 cw(c-2069.22,-1134.21) -2010,-1134.21 cw(c-1950.79,-1134.21) J12.2@-1992.66,-1092.34 ; J12.2@-2020.27,-1085.27 cw(c-2045.07,-1110.07) -2010,-1110.07 cw(c-1974.93,-1110.07) J12.2@-1999.73,-1085.27 ; J12.2@-2010,-1075 -2010,-1225 -1975,-1260 -1650,-1260 -1625,-1285 U3.26@-1625,-1361.73 ; U3.26@-1629.68,-1328.31 ccw(c-1640.97,-1317.02) -1625,-1317.02 ccw(c-1609.03,-1317.02) U3.26@-1620.32,-1328.31
SH16-27: J12.3 U3.27 | length 856.8
  Top Layer w10: J12.3@-2127.34,-1092.34 cw(c-2169.22,-1134.21) -2110,-1134.21 cw(c-2050.79,-1134.21) J12.3@-2092.66,-1092.34 ; J12.3@-2120.27,-1085.27 cw(c-2145.07,-1110.07) -2110,-1110.07 cw(c-2074.93,-1110.07) J12.3@-2099.73,-1085.27 ; J12.3@-2110,-1075 -2110,-1240 -2065,-1285 -1695,-1285 -1675,-1305 U3.27@-1675,-1361.73 ; U3.27@-1679.68,-1328.31 ccw(c-1690.97,-1317.02) -1675,-1317.02 ccw(c-1659.03,-1317.02) U3.27@-1670.32,-1328.31
SH16-28: J12.4 U3.28 | length 754.8
  Top Layer w10: J12.4@-2210,-1075 -2210,-1290 -2138.27,-1361.73 U3.28@-1725,-1361.73 ; U3.28@-1729.68,-1366.41 ccw(c-1740.97,-1377.7) -1740.97,-1361.73 ccw(c-1740.97,-1345.76) U3.28@-1729.68,-1357.05
TR: R15.1 U1.9 | length 1677.3
  Top Layer w15: v1(-2320,-3095) -2245,-3095 -2205,-3055 v1(-1725,-3055) ; v1@-2307.63,-3107.37 cw(c-2277.75,-3137.25) -2277.75,-3095 cw(c-2277.75,-3052.75) v1@-2307.63,-3082.63 ; v1@-1737.37,-3067.37 ccw(c-1767.25,-3097.25) -1767.25,-3055 ccw(c-1767.25,-3012.75) v1@-1737.37,-3042.63
  Bottom Layer w15: U1.9@-2895.43,-3276.73 -2895.43,-3323.93 -2893.63,-3325.73 -2653.74,-3325.73 -2423.02,-3095 v1(-2320,-3095) ; R15.1@-1795,-3055 v1(-1725,-3055) ; R15.1@-1778.51,-3069.49 cw(c-1743.51,-3104.49) v1@-1743.51,-3055 ; R15.1@-1778.51,-3040.5 ccw(c-1743.51,-3005.51) v1@-1743.51,-3055 ; v1@-1737.37,-3067.37 ccw(c-1767.25,-3097.25) -1767.25,-3055 ccw(c-1767.25,-3012.75) v1@-1737.37,-3042.63
"USO ALTO": R5.2 U1.8 | length 964.4
  Top Layer w15: v1(-3250.63,-3207.5) -2917.5,-3207.5 -2891.52,-3181.52 v1(-2841.63,-3181.52) ; v1@-3238.26,-3219.87 cw(c-3208.39,-3249.75) -3208.39,-3207.5 cw(c-3208.39,-3165.25) v1@-3238.26,-3195.12
  Bottom Layer w15: R5.2@-3296.52,-3374.37 -3260.63,-3374.37 ; R5.2@-3278.86,-3384.78 cw(c-3260.64,-3395.53) -3260.64,-3374.37 ; R5.2@-3278.86,-3363.95 ccw(c-3260.64,-3353.2) -3260.64,-3374.37 ; v1@-3263.01,-3219.87 cw(c-3292.88,-3249.75) -3250.63,-3249.75 cw(c-3208.39,-3249.75) v1@-3238.26,-3219.87 ; v1(-3250.63,-3207.5) -3250.63,-3364.37 -3260.63,-3374.37 ; U1.8@-2921.02,-3276.73 -2921.02,-3204.52 -2898.02,-3181.52 v1(-2841.63,-3181.52)
"USO BAJO": R3.2 U1.14 | length 1693.2
  Top Layer w15: v1(-3367.63,-2682.64) -3367.63,-3531.52 -3269.63,-3629.52 -2960.91,-3629.52 v1(-2928.37,-3596.98)
  Bottom Layer w15: v1(-3367.63,-2682.64) -3317.64,-2682.64 -3296.52,-2661.52 R3.2@-3296.52,-2579.37 ; R3.2@-3311.02,-2595.86 cw(c-3346.01,-2630.86) -3296.52,-2630.86 cw(c-3247.03,-2630.86) R3.2@-3282.03,-2595.86 ; U1.14@-2946.61,-3493.27 -2946.61,-3578.74 v1(-2928.37,-3596.98)
"USO MEDIO": R4.2 U1.13 | length 1772.1
  Bottom Layer w15: R4.2@-3311.02,-2988.86 ccw(c-3346.01,-3023.86) -3346.01,-2974.37 ccw(c-3346.01,-2924.87) R4.2@-3311.02,-2959.87 ; R4.2@-3296.52,-2974.37 -3396.63,-2974.37 -3596.63,-3174.37 -3596.63,-3569.52 -3511.91,-3654.25 -2902.86,-3654.25 -2880.13,-3631.52 -2880.13,-3584.56 -2921.02,-3543.67 U1.13@-2921.02,-3493.27
VCC: IR1.3 J1.6 J2.1 J3.3 R1.2 R2.2 R6.1 R7.1 U1.3 U2.14 U.8 | length 6819
  Top Layer w15: v1@-1027.37,-2402.63 ccw(c-1057.25,-2372.75) -1015,-2372.75 ccw(c-972.75,-2372.75) v1@-1002.63,-2402.63 ; v1(-1015,-2415) -1015,-2315 -985.51,-2285.51 IR1.3@-807.24,-2285.51 -807.24,-2412.76 -685,-2535 -685,-3265 -707.82,-3287.82 J2.1@-762.17,-3287.82 ; J2.1@-746.6,-3303.4 cw(c-708.99,-3341) -708.99,-3287.82 cw(c-708.99,-3234.64) J2.1@-746.6,-3272.25
  Bottom Layer w15: U.8@-3080,-3101 -3080,-3188.5 -3048.98,-3219.52 U1.3@-3048.98,-3276.73 -3048.98,-3372.23 -3027.68,-3393.52 -2710.63,-3393.52 R7.1@-2699.36,-3438.48 -2666.68,-3438.48 ; R7.1@-2716.25,-3424.85 ccw(c-2747.94,-3403) -2710.6,-3393.64 ccw(c-2675,-3384.72) R7.1@-2690.63,-3417.93 ; R7.1@-2705.9,-3433.59 cw(c-2688.74,-3451.67) -2671.12,-3434.04 ; R7.1@-2699.38,-3430.98 cw(c-2699.3,-3491.62) -2656.42,-3448.74 ; R7.1@-2699.36,-3445.98 cw(c-2699.24,-3542.68) -2630.86,-3474.3 ; R7.1@-2695.58,-3444.47 cw(c-2678.14,-3462.84) -2660.23,-3444.93 ; R7.1@-2685.25,-3455.35 cw(c-2667.54,-3474.02) -2649.34,-3455.82 ; R7.1@-2680.91,-3447.4 cw(c-2666.68,-3454.28) -2666.68,-3438.48 ; R7.1@-2680.91,-3429.55 ccw(c-2666.68,-3422.67) -2666.68,-3438.48 ; R6.1@-2378.86,-3292.97 cw(c-2413.86,-3327.97) -2364.36,-3327.97 cw(c-2314.87,-3327.97) R6.1@-2349.87,-3292.97 ; J1.6@-2377.86,-3433.48 cw(c-2434.6,-3433.48) -2394.48,-3473.59 cw(c-2354.36,-3513.71) -2354.36,-3456.98 cw(c-2354.36,-3513.71) -2314.25,-3473.59 cw(c-2274.13,-3433.48) J1.6@-2330.86,-3433.48 ; J1.6@-2370.98,-3416.86 ccw(c-2411.1,-3376.74) -2354.36,-3376.74 ccw(c-2297.63,-3376.74) J1.6@-2337.75,-3416.86 ; R6.1@-2364.36,-3278.48 -2364.36,-3351.52 -2354.36,-3361.52 J1.6@-2354.36,-3433.48 ; J3.3@-1680.58,-3565.58 ccw(c-1718.18,-3603.18) -1718.18,-3550 ccw(c-1718.18,-3496.82) J3.3@-1680.58,-3534.42 ; J3.3@-1665,-3527.97 ccw(c-1665,-3474.79) -1627.4,-3512.4 ccw(c-1589.79,-3550) J3.3@-1642.97,-3550 ; U2.14@-1542,-2645 -1542.63,-2644.37 -1542.63,-2571.52 -1496.11,-2525 R1.2@-1012.16,-2525 ; -1065.8,-2525 cw(c-1065.8,-2579.69) R1.2@-1027.13,-2541.02 ; -1058.45,-2525 ccw(c-1058.45,-2480.71) -1027.13,-2512.03 ccw(c-1056.42,-2482.74) -1015,-2482.74 ; R2.2@-1027.13,-3306.02 ccw(c-1062.13,-3341.01) -1062.13,-3291.52 ccw(c-1062.13,-3242.03) R2.2@-1027.13,-3277.03 ; R2.2@-1025.13,-3306.02 cw(c-1060.13,-3341.01) -1010.63,-3341.01 cw(c-961.14,-3341.01) R2.2@-996.14,-3306.02 ; -1015,-2471.32 ccw(c-957.43,-2471.32) R1.2@-998.14,-2512.03 ; v1(-1015,-2415) -1015,-2522.16 R1.2@-1012.16,-2525 ; R1.2@-1010.63,-2526.52 R1.2@-1012.16,-2525 ; J2.1@-777.75,-3303.4 cw(c-815.35,-3341) -762.17,-3341 cw(c-708.99,-3341) J2.1@-746.6,-3303.4 ; J2.1@-762.17,-3287.82 -762.17,-3411.52 -805.17,-3454.52 -967.63,-3454.52 -1010.63,-3411.52 R2.2@-1010.63,-3291.52 -1406.52,-3291.52 J3.3@-1665,-3550 -2237.84,-3550 J1.6@-2354.36,-3433.48 ; -2666.68,-3438.48 -2622.63,-3482.52 -2403.41,-3482.52 J1.6@-2354.36,-3433.48
pads on no net: J1.3 J1.5 J2.4 J4.3 J5.3 J5.5 J6.3 J6.5

## Polygon pours and split planes (outlines as drawn)
SH16-8 on Top Layer "Bottom Layer-No Net" (solid, remove dead copper, pour order 11): -2300,-1015 -2295,-1010 -840,-1010 -840,-2040 -845,-2045 -2300,-2045 -2300,-1015
SH4-4 on Top Layer "Bottom Layer-No Net" (solid, remove dead copper, pour order 13): -3600,-1320 -3595,-1315 -2480,-1315 -2480,-2050 -3600,-2050 -3600,-1315
GND on Top Layer "Bottom Layer-No Net" (solid, remove dead copper, pour order 14): -3890.63,-2216.52 -545.63,-2216.52 -545.43,-2216.73 -545.43,-2771.65 -646.3,-2771.65 -646.71,-2771.24 -646.71,-3524.98 -545.43,-3524.98 -545.43,-3677.16 -3892.8,-3677.16 -3893.8,-3676.16 -3896.9,-3673.06 -3896.9,-3530 -3787.16,-3530 -3785.63,-3531.52 -3790.6,-3526.56 -3790.6,-2771.24 -3891.88,-2771.24 -3890.63,-2769.99 -3890.63,-2216.52
SH16-8 on Bottom Layer "Bottom Layer-No Net" (solid, remove dead copper, pour order 15): -2300,-1015 -2295,-1010 -840,-1010 -840,-2040 -845,-2045 -2300,-2045 -2300,-1015
SH4-4 on Bottom Layer "Bottom Layer-No Net" (solid, remove dead copper, pour order 16): -3600,-1315 -3595,-1310 -2480,-1310 -2480,-2045 -3600,-2045 -3600,-1310
GND on Bottom Layer "Bottom Layer-No Net" (solid, remove dead copper, pour order 12): -3890.63,-2216.52 -545.63,-2216.52 -545.43,-2216.73 -545.43,-2771.65 -646.3,-2771.65 -646.71,-2771.24 -646.71,-3524.98 -545.43,-3524.98 -545.43,-3677.16 -3892.8,-3677.16 -3893.8,-3676.16 -3896.9,-3673.06 -3896.9,-3530 -3787.16,-3530 -3785.63,-3531.52 -3790.6,-3526.56 -3790.6,-2771.24 -3891.88,-2771.24 -3890.63,-2769.99 -3890.63,-2216.52

## Silkscreen, mask and mechanical layers (free items; w line width, h text height)
Top Overlay:
  lines w10: -3600,-2210 -3600,-2045 ; -2480,-2215 -2480,-1310 ; -2480,-2035 -2480,-2045 -3600,-2045 ; -2300,-2215 -2300,-1305 ; -2300,-2045 -845,-2045 ; -840,-2215 -840,-1010 -2300,-1010 -2300,-1310 -3600,-1310 -3600,-2045 ; -3891.88,-3671.73 -3891.88,-3530 -3785.58,-3530 -3785.58,-2766.22 -3891.88,-2766.22 -3891.88,-2215.04 -545.43,-2215.04 -545.43,-2766.22 -651.73,-2766.22 -651.73,-3530 -545.43,-3530 -545.43,-3671.73 -3891.88,-3671.73
  text "V" at -2065,-1765 h60 r90
  text "V" at -3340,-1850 h60
  text "G" at -2060,-1865 h60 r90
  text "ALTO" at -3325,-2510 h60
  text "ON/OFF" at -1510.63,-2551.52 h60
  text "12" at -3745,-2815 h50
  text "MEDIO" at -3330,-2900 h60
  text "G" at -830,-2905 h45 r90
  text "O" at -822.63,-3099.52 h45 r90
  text "DC" at -829.63,-3208.52 h40 r90
  text "C. VEL." at -1450.63,-3301.52 h60
  text "BAJO" at -3335,-3305 h60
  text "VCC" at -829.63,-3338.52 h40 r90
  text "G" at -3730,-3415 h50

## Text inside footprints (layer, text, board x,y; h text height)
BZ1: Top Overlay "+" at -2657.83,-2408.7 h66.93 r180